# EAGLE board pcb (EAGLE 7.1.0)
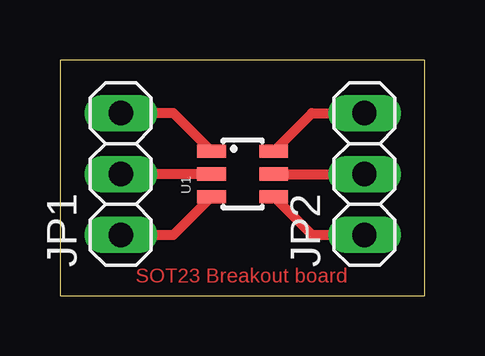
[diagram p0: board, top side]

Size 15.22 x 9.83 mm. Coordinates in mm from the lower left corner, seen from the top.
Outline: 0,0 15.22,0 15.22,9.83 0,9.83 0,0
Copper layers (1*16): Top 0.035mm / dielectric 1.5mm / Bottom 0.035mm
Design rules "default": minimum track width 10mil, minimum drill 24mil, track to track 8mil, track to pad 8mil, pad to pad 8mil, via to via 8mil, smd to smd 8mil, copper to edge 40mil, drill to drill 8mil, minimum pad ring 10mil, minimum via ring 8mil, stop-mask expansion 4mil, vias tented up to drill 0mil, thermal gap 10mil

## Footprints (pad centres in the part's own frame; a part is rotated, then mirrored left to right if it is on the bottom)
1X03 = drill 1.016 long: 1 -2.54,0; 2 0,0; 3 2.54,0
SOT23-6 = smd 0.55 x 1.2: 1 0.95,1.3; 2 0,1.3; 3 -0.95,1.3; 4 -0.95,-1.3; 5 0,-1.3; 6 0.95,-1.3

## Placement (x,y rotation side)
JP1  [1X03]  2.54,5.08 90 top
JP2  [1X03]  12.7,5.08 90 top
U1  MCP4725  [SOT23-6]  7.62,5.08 90 top

## Library data of the parts
JP1 JP2 = pinhead
U1 = Sparkfun-Eagle-Libraries; PROD_ID: IC-08886

## Nets
N$1: JP1.1 U1.3
N$2: JP1.2 U1.2
N$3: JP1.3 U1.1
N$4: JP2.3 U1.6
N$5: JP2.2 U1.5
N$6: JP2.1 U1.4

## Tracks (layer width: path | path; a pad name or v marks a point on that pad's centre or on a via)
N$1
  Top 0.406: JP1.1 4.73,2.54 U1.3
N$2
  Top 0.406: U1.2 JP1.2
N$3
  Top 0.406: U1.1 4.73,7.62 JP1.3
N$4
  Top 0.406: U1.6 10.51,7.62 JP2.3
N$5
  Top 0.406: U1.5 JP2.2
N$6
  Top 0.406: U1.4 10.51,2.54 JP2.1

## Text on the board
Top: SOT23 Breakout board